# EAGLE board ShieldOV7670FlatCable (EAGLE 9.4.2)
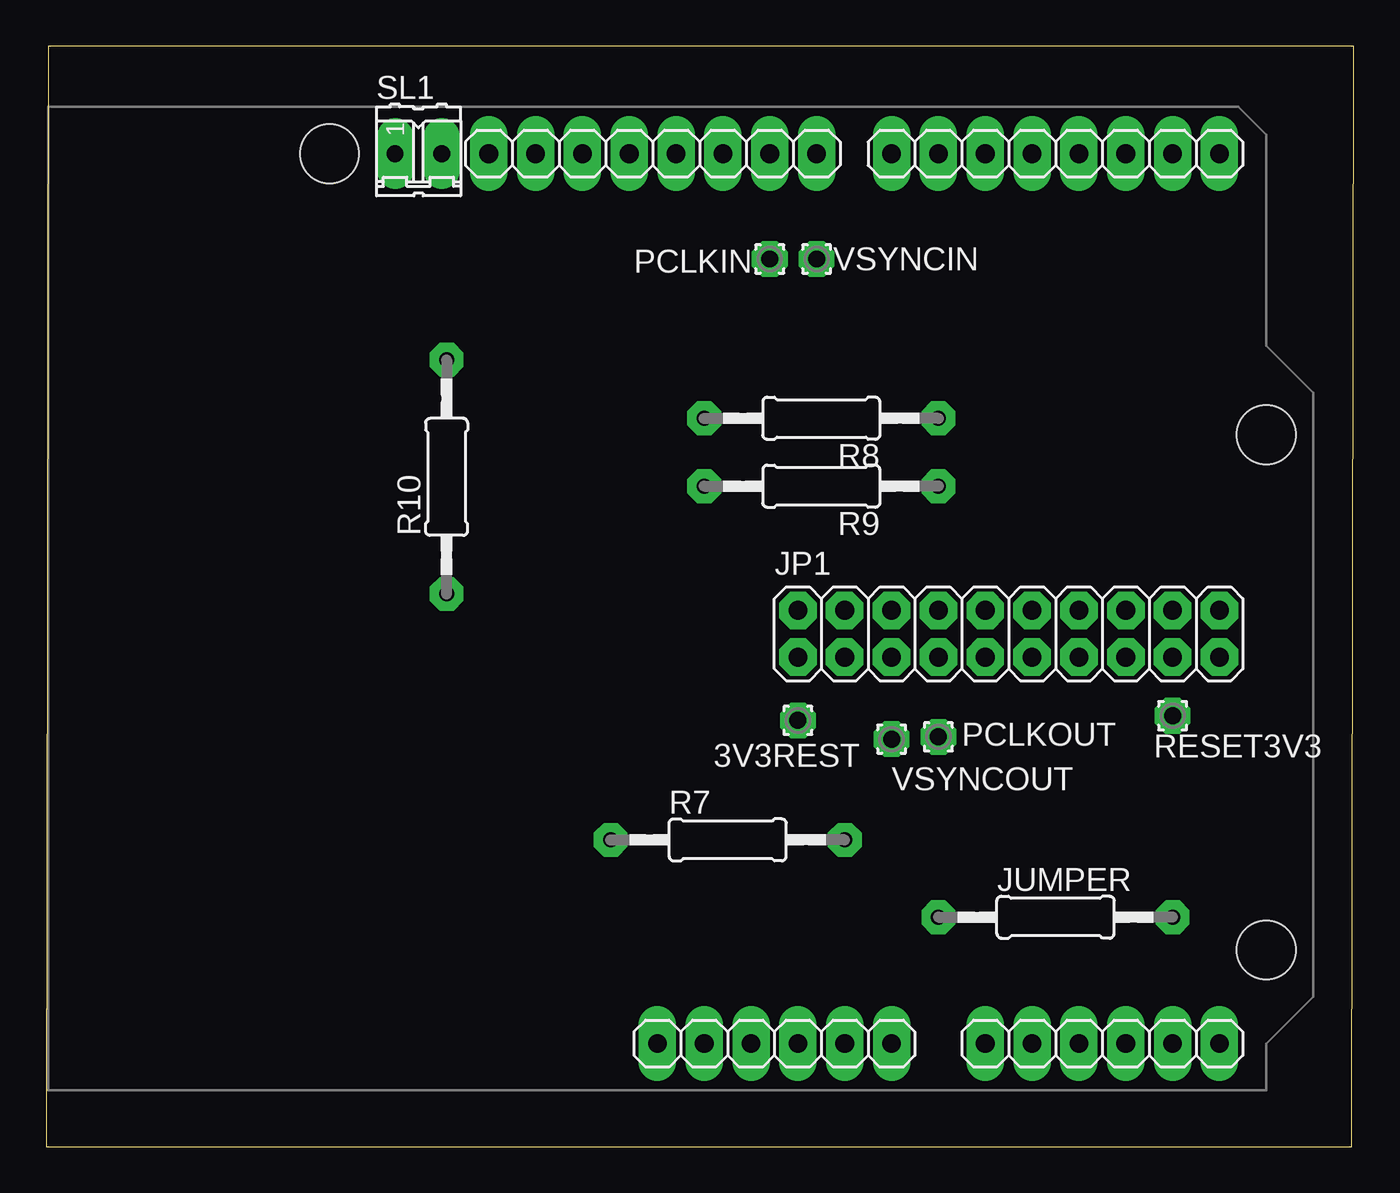
[diagram p0: board, top side]
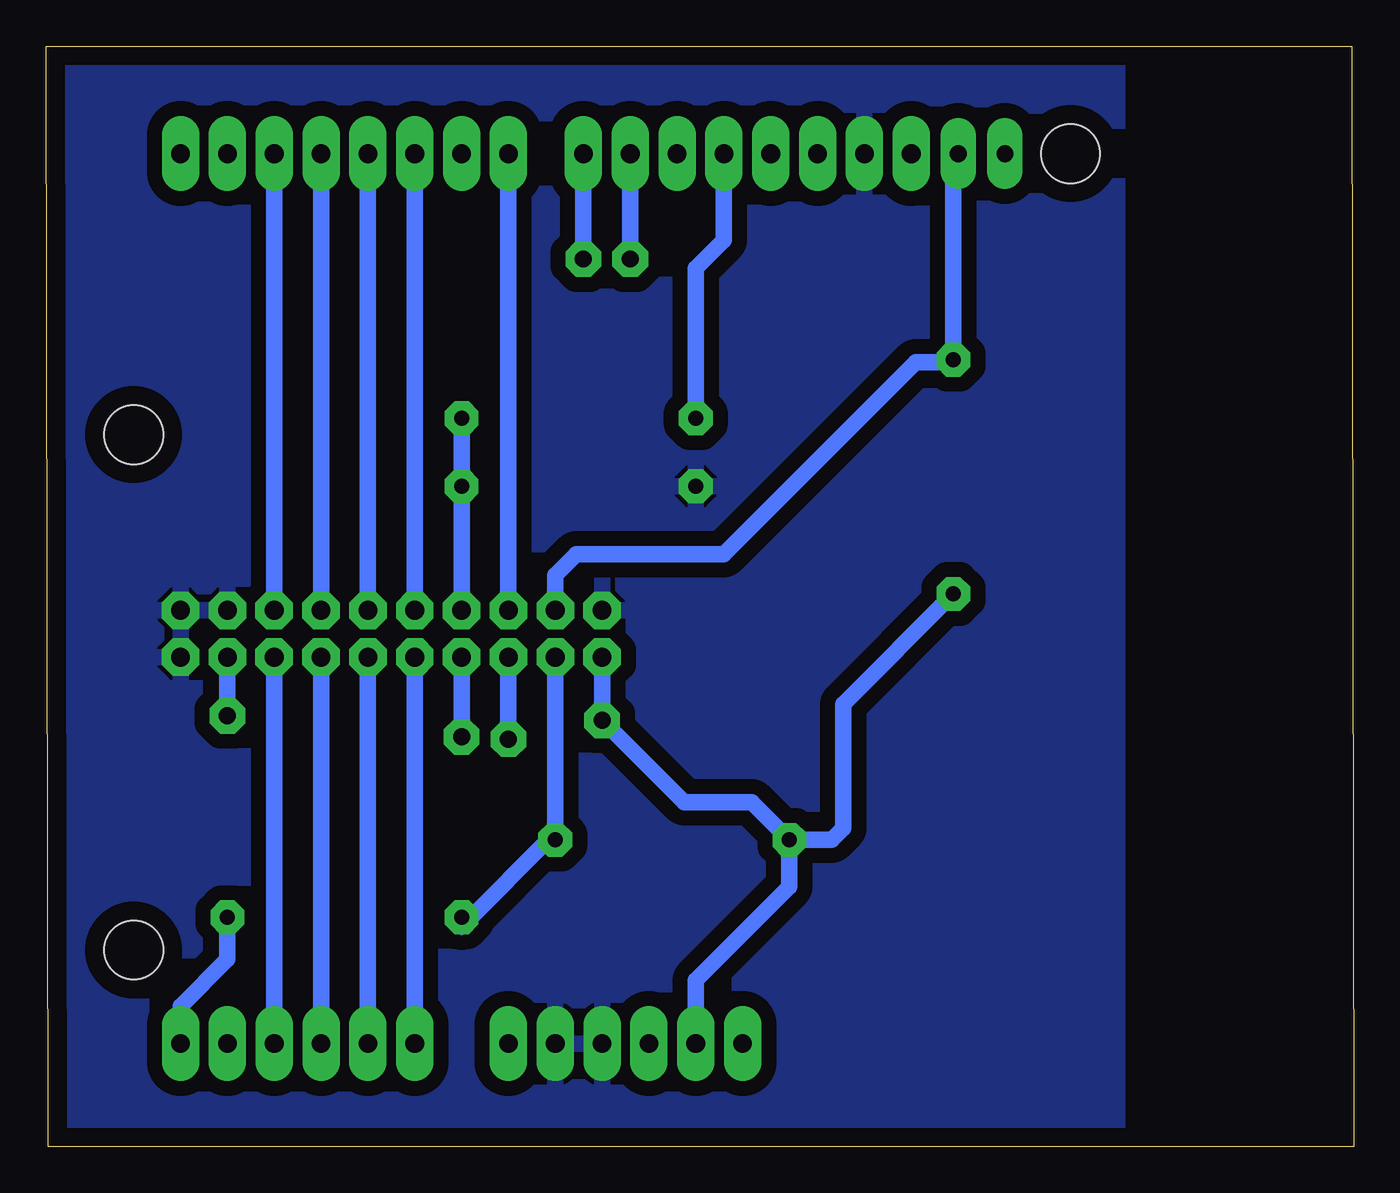
[diagram p1: board, bottom side, seen from below]

Size 70.92 x 59.68 mm. Coordinates in mm from the lower left corner, seen from the top.
Outline: 0,0 70.79,0 70.92,59.68 0.13,59.68 0,0
Copper layers (1*16): Top 0.035mm / dielectric 1.5mm / Bottom 0.035mm
Design rules "default *": minimum track width 35mil, minimum drill 0.35mm, track to track 20mil, track to pad 20mil, pad to pad 20mil, via to via 20mil, smd to smd 6mil, copper to edge 40mil, drill to drill 6mil, minimum pad ring 20mil, minimum via ring 8mil, stop-mask expansion 4mil, vias tented up to drill 0mil, thermal gap 10mil

## Footprints (pad centres in the part's own frame; a part is rotated, then mirrored left to right if it is on the bottom)
1,6/0,9 = drill 0.914 pad 1.6 octagon: 1 0,0
ARDUINO2009_2 = drill 1.016 long: 1 33.02,2.54; 2 35.56,2.54; 3 38.1,2.54; 4 40.64,2.54; 5 43.18,2.54; 6 45.72,2.54; 7 50.8,2.54; 8 53.34,2.54; 9 55.88,2.54; 10 58.42,2.54; 11 60.96,2.54; 12 63.5,2.54; 13 63.5,50.8; 14 60.96,50.8; 15 58.42,50.8; 16 55.88,50.8; 17 53.34,50.8; 18 50.8,50.8; 19 48.26,50.8; 20 45.72,50.8; 21 41.656,50.8; 22 39.116,50.8; 23 36.576,50.8; 24 34.036,50.8; 25 31.496,50.8; 26 28.956,50.8; 27 26.416,50.8; 28 23.876,50.8 | hole 3.2: 15.24,50.8; 66.04,35.56; 66.04,7.62
2X10 = drill 1.016 octagon: 1 -11.43,-1.27; 2 -11.43,1.27; 3 -8.89,-1.27; 4 -8.89,1.27; 5 -6.35,-1.27; 6 -6.35,1.27; 7 -3.81,-1.27; 8 -3.81,1.27; 9 -1.27,-1.27; 10 -1.27,1.27; 11 1.27,-1.27; 12 1.27,1.27; 13 3.81,-1.27; 14 3.81,1.27; 15 6.35,-1.27; 16 6.35,1.27; 17 8.89,-1.27; 18 8.89,1.27; 19 11.43,-1.27; 20 11.43,1.27
0207/12 = drill 0.813 octagon: 1 -6.35,0; 2 6.35,0
02P = drill 0.914 long: 1 -1.27,0; 2 1.27,0

## Placement (x,y rotation side)
3V3REST  [1,6/0,9]  40.77,23.11 0 top
IC1  [ARDUINO2009_2]  0.13,3.05 0 top
JP1  [2X10]  52.2,27.81 0 top
JUMPER  [0207/12]  54.74,12.45 0 top
PCLKIN  [1,6/0,9]  39.24,48.13 0 top
PCLKOUT  [1,6/0,9]  48.39,22.23 0 top
R7  [0207/12]  36.96,16.64 0 top
R8  [0207/12]  42.04,39.5 180 top
R9  [0207/12]  42.04,35.81 180 top
R10  [0207/12]  21.72,36.32 90 top
RESET3V3  [1,6/0,9]  61.09,23.37 0 top
SL1  [02P]  20.19,53.85 0 top
VSYNCIN  [1,6/0,9]  41.78,48.13 0 top
VSYNCOUT  [1,6/0,9]  45.85,22.1 0 top

## Library data of the parts
3V3REST PCLKIN PCLKOUT RESET3V3 VSYNCIN VSYNCOUT = wirepad
IC1 = arduino
JP1 = pinhead
JUMPER R7-R10 = rcl; SPICEPREFIX: R
SL1 = con-amp-quick; OC_FARNELL: unknown; OC_NEWARK: unknown

## Nets
3V3: 3V3REST.1 IC1.2 JP1.1 R7.1 R10.1
+5V: IC1.3
D0: IC1.15 JP1.16
D1: IC1.10 JP1.15
D2: IC1.16 JP1.14
D3: IC1.9 JP1.13
D4: IC1.17 JP1.12
D5: IC1.8 JP1.11
D6: IC1.18 JP1.10
D7: IC1.7 JP1.9
GND: IC1.4 IC1.5 IC1.27 JP1.2 JP1.18 JP1.19 JP1.20 R9.2
HREF: IC1.20 JP1.6
N$1: IC1.21 VSYNCIN.1
N$2: IC1.22 PCLKIN.1
N$3: JP1.5 VSYNCOUT.1
N$4: JP1.7 PCLKOUT.1
N$5: IC1.12 JUMPER.2
N$6: JP1.17 RESET3V3.1
N$7: IC1.24 R8.2
SCL: JP1.3 JUMPER.1 R7.2
SDA: JP1.4 R10.2 SL1.2
XCLK: JP1.8 R8.1 R9.1

## Tracks (layer width: path | path; a pad name or v marks a point on that pad's centre or on a via)
3V3
  Bottom 0.889: JP1.1 3V3REST.1 36.32,18.67 32.64,18.67 R7.1 | R7.1 30.61,14.1 35.69,9.02 IC1.2 | R10.1 27.69,24 27.69,17.27 28.32,16.64 R7.1
D0
  Bottom 0.889: IC1.15 JP1.16
D1
  Bottom 0.889: JP1.15 IC1.10
D2
  Bottom 0.889: IC1.16 JP1.14
D3
  Bottom 0.889: JP1.13 IC1.9
D4
  Bottom 0.889: IC1.17 JP1.12
D5
  Bottom 0.889: JP1.11 IC1.8
D6
  Bottom 0.889: IC1.18 JP1.10
D7
  Bottom 0.889: IC1.7 JP1.9
GND
  pour Bottom (isolate 0.813): 12.83,59.05 12.83,0.76 70.23,0.76 70.23,59.05
HREF
  Bottom 0.889: IC1.20 JP1.6
N$1
  Bottom 0.889: VSYNCIN.1 IC1.21
N$2
  Bottom 0.889: IC1.22 PCLKIN.1
N$3
  Bottom 0.889: JP1.5 VSYNCOUT.1
N$4
  Bottom 0.889: JP1.7 PCLKOUT.1 48.39,22.1
N$5
  Bottom 0.889: IC1.12 63.63,7.62 61.09,10.16 JUMPER.2
N$6
  Bottom 0.889: JP1.17 RESET3V3.1
N$7
  Bottom 0.889: R8.2 35.69,47.62 34.16,49.15 IC1.24
SCL
  Bottom 0.889: 43.31,17.02 48.39,11.94 JUMPER.1 | 43.31,17.02 JP1.3 | 43.31,17.02 R7.2
SDA
  Bottom 0.889: JP1.4 43.31,30.99 42.16,32.13 34.16,32.13 23.75,42.55 21.84,42.55 R10.2 21.72,53.85 SL1.2
XCLK
  Bottom 0.889: JP1.8 R9.1 48.39,36.07 R8.1 48.39,39.88